# Altium PCB BEE-1012 PAY-IF V1.0.0.PcbDoc (part 2 of 3)
Units mm, origin at the board's own origin, x right, y up, seen from the top; angles counter-clockwise.
Board outline 93 x 90 mm, 8 copper layers (Top Layer, GND_Plane_2, Signal_3, Power_Plane, GND_Plane_5, Signal_6, GND_Plane_7, Bottom Layer), stack 1.672 mm thick; 514 components, 368 nets, 2268 pads, 326 vias.
Unrouted connection lines stored in the file: 1343.
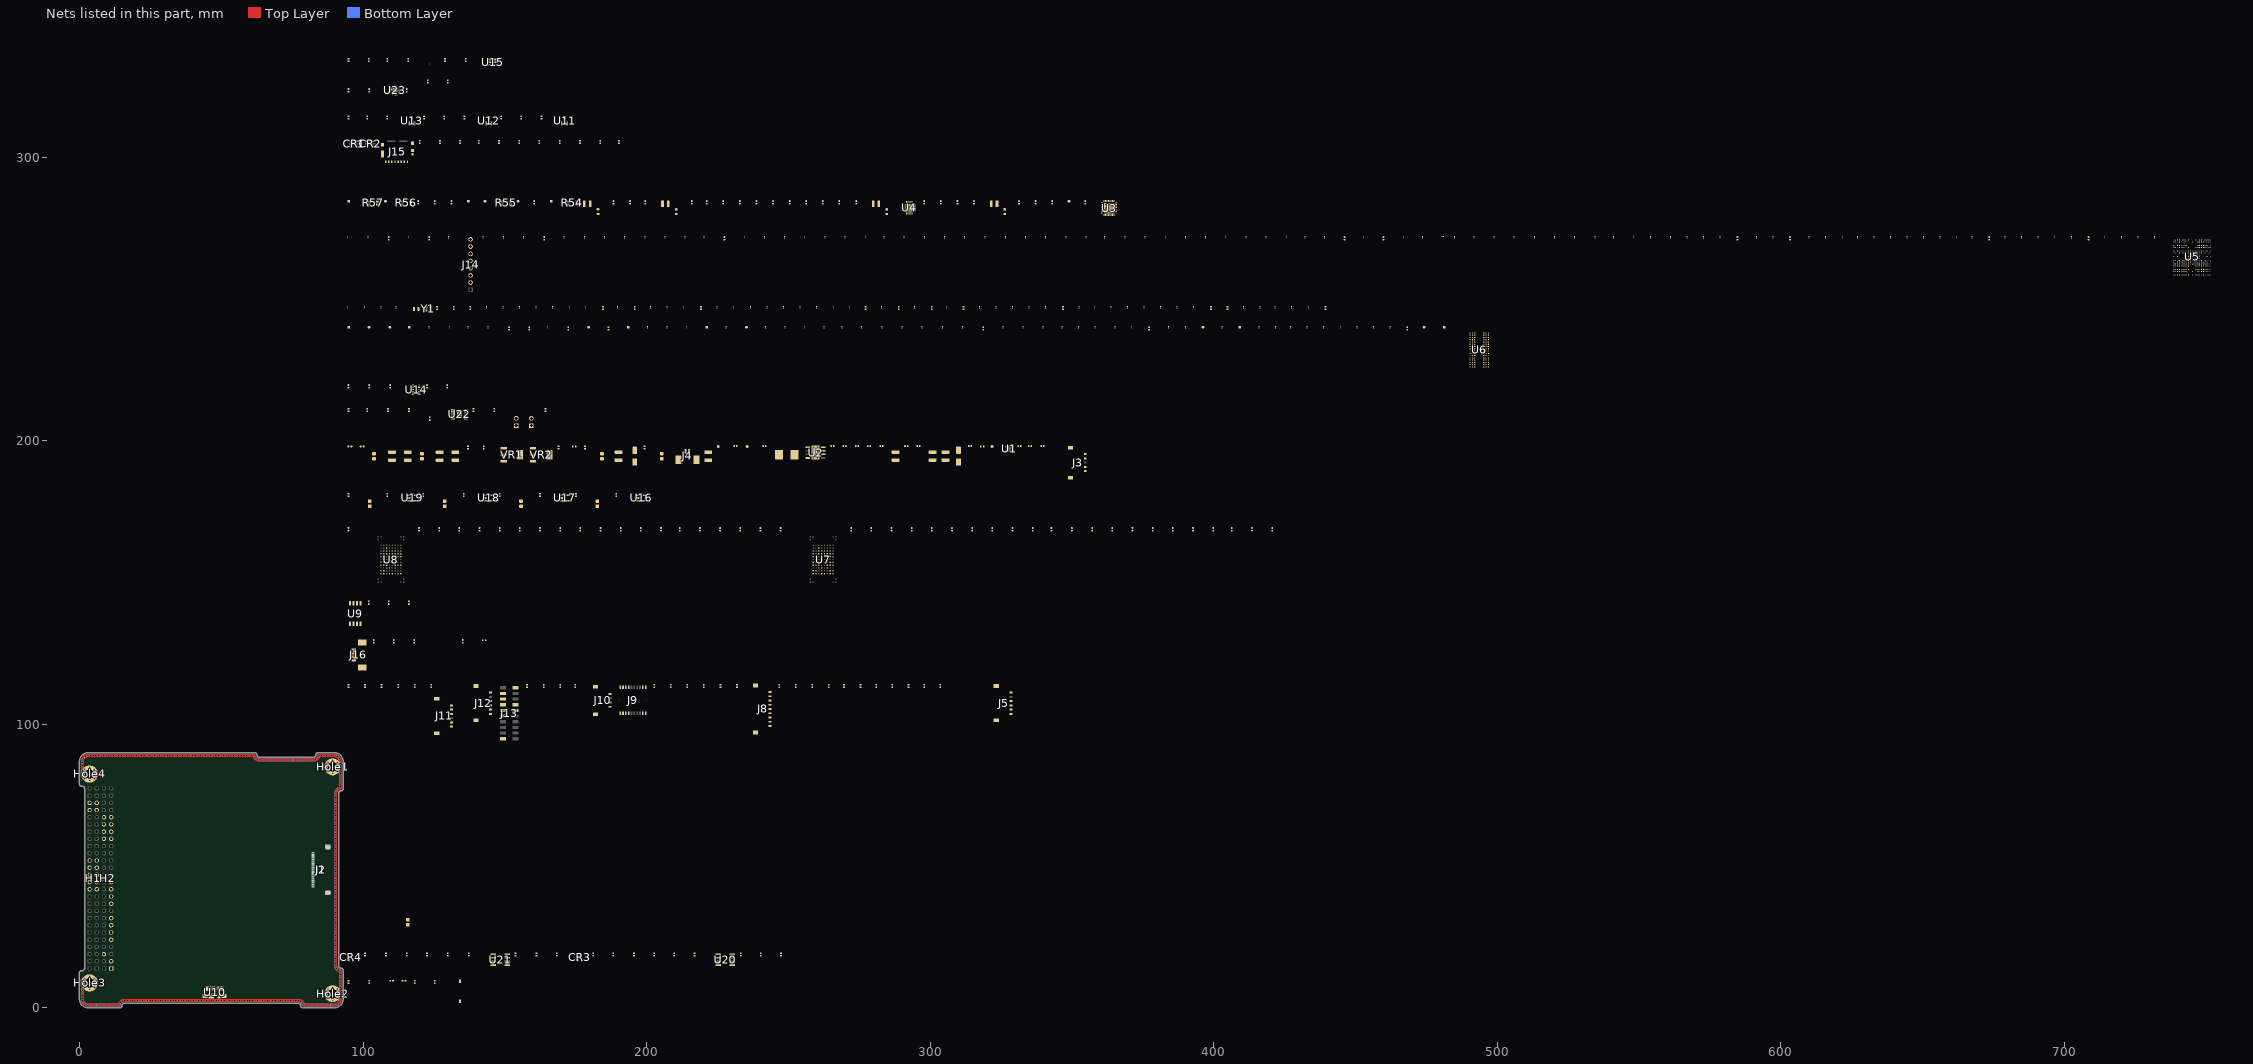
[diagram p6: the nets of this part, all layers, seen from the top]

## Footprints (in the part's own frame and the unit in brackets; to place one, negate y for a bottom-side part, rotate by r counter-clockwise, add the part's x,y. Pads: shape width x height; smd on the part's side, far side on the other; paste and mask are expansions set on the pad) (continued)
RES_C_0603X30 [mm] "Chip Resistor, 2-Leads, Body 0.6x0.3mm, IPC Medium Density"
  rrect50% 0.275x0.3 smd mask+0.05: 1(-0.262,0) 2(0.262,0)
  body extent -0.3,-0.15 0.3,0.15, height 0.22
RES_C_1005x30_L [mm] "Chip Resistor, 2-Leads, Body 1.0x0.5mm, IPC Medium Density"
  rrect50% 0.55x0.6 smd mask+0.05: 1(-0.45,0) 2(0.45,0)
  body extent -0.5,-0.3 0.5,0.3, height 0.2
RES_C_1005X40 [mm]
  rrect50% 0.65x0.6 smd mask+0.05: 1(-0.5,0) 2(0.5,0)
  silkscreen extent -0.04,-0.3 0.04,0.3, body extent -0.5,-0.25 0.5,0.25, height 0.38
RES_C_1206_SHUNT [mm] "Chip Resistor, 2-Leads, Body 3.2x1.6mm, IPC Medium Density"
  rect 1x0.5 smd mask+0.1: 1(-1.5,-0.6) 1(-1.5,0.6) 2(1.5,-0.6) 2(1.5,0.6)
  rect 1x0.35 smd mask+0.1: 3(-1.5,0) 4(1.5,0)
  silkscreen extent -0.6,-0.77 0.6,0.78, body extent -1.6,-0.8 1.6,0.8, height 1
SAMTEC-TLE-110-01-X-DV-A [mm]
  rect 1.12x2.11 smd mask+0: 1(-9,-2.222) 2(-9,2.222) 3(-7,-2.222) 4(-7,2.222) 5(-5,-2.222) 6(-5,2.222) 7(-3,-2.222) 8(-3,2.222) 9(-1,-2.222) 10(-1,2.222) 11(1,-2.222) 12(1,2.222) 13(3,-2.222) 14(3,2.222) 15(5,-2.222) 16(5,2.222) 17(7,-2.222) 18(7,2.222) 19(9,-2.222) 20(9,2.222)
  round 0.76 hole 0.76 unplated: ""(-8,0) ""(8,0)
  silkscreen extent -10.45,-4.45 10.45,3.73, body extent -9.99,-2.78 9.99,2.78, height 4.32
SAMTEC_ESQ-126-14-G-D [mm]
  rect 1.53x1.53 hole 0.9: 01(0,0)
  round 1.53 hole 0.9: 02(0,2.54) 03(2.54,0) 04(2.54,2.54) 05(5.08,0) 06(5.08,2.54) 07(7.62,0) 08(7.62,2.54) 09(10.16,0) 10(10.16,2.54) 11(12.7,0) 12(12.7,2.54) 13(15.24,0) 14(15.24,2.54) 15(17.78,0) 16(17.78,2.54) 17(20.32,0) 18(20.32,2.54) 19(22.86,0) 20(22.86,2.54) 21(25.4,0) 22(25.4,2.54) 23(27.94,0) 24(27.94,2.54) 25(30.48,0) 26(30.48,2.54) 27(33.02,0) 28(33.02,2.54) 29(35.56,0) 30(35.56,2.54) 31(38.1,0) 32(38.1,2.54) 33(40.64,0) 34(40.64,2.54) 35(43.18,0) 36(43.18,2.54) 37(45.72,0) 38(45.72,2.54) 39(48.26,0) 40(48.26,2.54) 41(50.8,0) 42(50.8,2.54) 43(53.34,0) 44(53.34,2.54) 45(55.88,0) 46(55.88,2.54) 47(58.42,0) 48(58.42,2.54) 49(60.96,0) 50(60.96,2.54) 51(63.5,0) 52(63.5,2.54)
  silkscreen extent -2.27,-1.2 65.03,3.74, body extent -1.52,-1.27 65.02,3.81, height 11.1
SAMTEC_FSI-110-03-X-D-AD-TR [mm]
  rect 0.61x1.26 smd: 01(-4.5,4.59) 02(-4.5,-4.59) 03(-3.5,4.59) 04(-3.5,-4.59) 05(-2.5,4.59) 06(-2.5,-4.59) 07(-1.5,4.59) 08(-1.5,-4.59) 09(-0.5,4.59) 10(-0.5,-4.59) 11(0.5,4.59) 12(0.5,-4.59) 13(1.5,4.59) 14(1.5,-4.59) 15(2.5,4.59) 16(2.5,-4.59) 17(3.5,4.59) 18(3.5,-4.59) 19(4.5,4.59) 20(4.5,-4.59)
  round 1.19 hole 1.19 unplated: ""(-4.5,0) ""(4.5,0)
  silkscreen extent -5.38,-4.38 5.38,5.9, body extent -5.38,-5 5.38,5, height 4.37
SOIC127P599X175-8N [mm]
  rrect25% 1.97x0.6 smd paste+0 mask+0.102: 1(-2.47,1.905) 2(-2.47,0.635) 3(-2.47,-0.635) 4(-2.47,-1.905) 5(2.47,-1.905) 6(2.47,-0.635) 7(2.47,0.635) 8(2.47,1.905)
  silkscreen extent -4.14,-2.52 1.95,2.52, body extent -3,-2.45 3,2.45, height 1.75
SOIC127P790X216-8N [mm]
  rect 1.65x0.7 smd: 1(-3.6,1.905) 2(-3.6,0.635) 3(-3.6,-0.635) 4(-3.6,-1.905) 5(3.6,-1.905) 6(3.6,-0.635) 7(3.6,0.635) 8(3.6,1.905)
  silkscreen extent -4.27,-2.62 2.42,2.62, body extent -3.95,-2.62 3.95,2.62, height 2.16
SOT323-3L_STM [mil]
  rect 18x40 smd paste+0 mask+0: 1(-25.59,-41) 2(25.59,-41) 3(0,41)
  silkscreen extent -48,-87 48,32, body extent -44,-47 44,47, height 43
SOT-23_MC_MCH [mil]
  rect 24x52 smd paste+0 mask+0: 1(-37.4,-39.97) 2(37.4,-39.97) 3(0,39.97)
  silkscreen extent -65,-94 65,33, body extent -60,-52 60,52, height 44
SRP7050TA-220M [mm]
  rect 2.95x3.5 smd: 1(-2.725,0) 2(2.725,0)
  silkscreen extent -4.4,-3.3 4.4,3.3, body extent -3.65,-3.3 3.65,3.3, height 4.6
SW2-SMD [mm]
  rect 1.2x0.8 smd: 1(-3.5,0) 2(3.5,0)
  silkscreen extent -2.82,-1.85 2.82,1.85, body extent -3.05,-1.85 3.05,1.85, height 2.5
"Test point" [mm]
  round 1 smd paste-2539.97 mask+0: 0(0,0)
  silkscreen extent -0.61,-0.61 0.61,0.61
TFBGA-343_14x14 [mm] "BGA, 343-Leads, Body 14,00mm x14,00mm, Pitch 0,65mm"
  round 0.3 smd mask+0.05: A1(-6.5,6.5) A2(-5.85,6.5) A3(-5.2,6.5) A4(-4.55,6.5) A5(-3.9,6.5) A6(-3.25,6.5) A7(-2.6,6.5) A8(-1.95,6.5) A9(-1.3,6.5) A11(0,6.5) A13(1.3,6.5) A14(1.95,6.5) A15(2.6,6.5) A16(3.25,6.5) A17(3.9,6.5) A18(4.55,6.5) A19(5.2,6.5) A20(5.85,6.5) A21(6.5,6.5) AA1(-6.5,-6.5) AA2(-5.85,-6.5) AA3(-5.2,-6.5) AA4(-4.55,-6.5) AA5(-3.9,-6.5) AA6(-3.25,-6.5) AA7(-2.6,-6.5) AA8(-1.95,-6.5) AA9(-1.3,-6.5) AA11(0,-6.5) AA13(1.3,-6.5) AA14(1.95,-6.5) AA15(2.6,-6.5) AA16(3.25,-6.5) AA17(3.9,-6.5) AA18(4.55,-6.5) AA19(5.2,-6.5) AA20(5.85,-6.5) AA21(6.5,-6.5) B1(-6.5,5.85) B2(-5.85,5.85) B3(-5.2,5.85) B4(-4.55,5.85) B6(-3.25,5.85) B7(-2.6,5.85) B9(-1.3,5.85) B13(1.3,5.85) B15(2.6,5.85) B16(3.25,5.85) B18(4.55,5.85) B19(5.2,5.85) B20(5.85,5.85) B21(6.5,5.85) C1(-6.5,5.2) C2(-5.85,5.2) C3(-5.2,5.2) C4(-4.55,5.2) C5(-3.9,5.2) C6(-3.25,5.2) C7(-2.6,5.2) C8(-1.95,5.2) C11(0,5.2) C14(1.95,5.2) C15(2.6,5.2) C16(3.25,5.2) C17(3.9,5.2) C18(4.55,5.2) C19(5.2,5.2) C20(5.85,5.2) C21(6.5,5.2) D1(-6.5,4.55) D2(-5.85,4.55) D3(-5.2,4.55) D4(-4.55,4.55) D5(-3.9,4.55) D6(-3.25,4.55) D7(-2.6,4.55) D8(-1.95,4.55) D9(-1.3,4.55) D13(1.3,4.55) D14(1.95,4.55) D15(2.6,4.55) D16(3.25,4.55) D17(3.9,4.55) D18(4.55,4.55) D19(5.2,4.55) D20(5.85,4.55) D21(6.5,4.55) E1(-6.5,3.9) E3(-5.2,3.9) E4(-4.55,3.9) E5(-3.9,3.9) E6(-3.25,3.9) E7(-2.6,3.9) E8(-1.95,3.9) E14(1.95,3.9) E15(2.6,3.9) E16(3.25,3.9) E17(3.9,3.9) E18(4.55,3.9) E19(5.2,3.9) E21(6.5,3.9) F1(-6.5,3.25) F2(-5.85,3.25) F3(-5.2,3.25) F4(-4.55,3.25) F5(-3.9,3.25) F6(-3.25,3.25) F7(-2.6,3.25) F8(-1.95,3.25) F9(-1.3,3.25) F13(1.3,3.25) F14(1.95,3.25) F15(2.6,3.25) F16(3.25,3.25) F17(3.9,3.25) F18(4.55,3.25) F19(5.2,3.25) F20(5.85,3.25) F21(6.5,3.25) G1(-6.5,2.6) G2(-5.85,2.6) G3(-5.2,2.6) G4(-4.55,2.6) G5(-3.9,2.6) G6(-3.25,2.6) G7(-2.6,2.6) G8(-1.95,2.6) G9(-1.3,2.6) G10(-0.65,2.6) G11(0,2.6) G12(0.65,2.6) G13(1.3,2.6) G14(1.95,2.6) G15(2.6,2.6) G16(3.25,2.6) G17(3.9,2.6) G18(4.55,2.6) G19(5.2,2.6) G20(5.85,2.6) G21(6.5,2.6) H1(-6.5,1.95) H3(-5.2,1.95) H4(-4.55,1.95) H5(-3.9,1.95) H6(-3.25,1.95) H7(-2.6,1.95) H8(-1.95,1.95) H9(-1.3,1.95) H10(-0.65,1.95) H11(0,1.95) H12(0.65,1.95) H13(1.3,1.95) H14(1.95,1.95) H15(2.6,1.95) H16(3.25,1.95) H17(3.9,1.95) H18(4.55,1.95) H19(5.2,1.95) H21(6.5,1.95) J1(-6.5,1.3) J2(-5.85,1.3) J4(-4.55,1.3) J6(-3.25,1.3) J7(-2.6,1.3) J8(-1.95,1.3) J9(-1.3,1.3) J10(-0.65,1.3) J11(0,1.3) J12(0.65,1.3) J13(1.3,1.3) J14(1.95,1.3) J15(2.6,1.3) J16(3.25,1.3) J18(4.55,1.3) J20(5.85,1.3) J21(6.5,1.3) K7(-2.6,0.65) K8(-1.95,0.65) K9(-1.3,0.65) K10(-0.65,0.65) K11(0,0.65) K12(0.65,0.65) K13(1.3,0.65) K14(1.95,0.65) K15(2.6,0.65) L1(-6.5,0) L3(-5.2,0) L7(-2.6,0) L8(-1.95,0) L9(-1.3,0) L11(0,0) L13(1.3,0) L14(1.95,0) L15(2.6,0) L19(5.2,0) L21(6.5,0) M7(-2.6,-0.65) M8(-1.95,-0.65) M9(-1.3,-0.65) M10(-0.65,-0.65) M11(0,-0.65) M12(0.65,-0.65) M13(1.3,-0.65) M14(1.95,-0.65) M15(2.6,-0.65) N1(-6.5,-1.3) N2(-5.85,-1.3) N4(-4.55,-1.3) N6(-3.25,-1.3) N7(-2.6,-1.3) N8(-1.95,-1.3) N9(-1.3,-1.3) N10(-0.65,-1.3) N11(0,-1.3) N12(0.65,-1.3) N13(1.3,-1.3) N14(1.95,-1.3) N15(2.6,-1.3) N16(3.25,-1.3) N18(4.55,-1.3) N20(5.85,-1.3) N21(6.5,-1.3) P1(-6.5,-1.95) P3(-5.2,-1.95) P4(-4.55,-1.95) P5(-3.9,-1.95) P6(-3.25,-1.95) P7(-2.6,-1.95) P8(-1.95,-1.95) P9(-1.3,-1.95) P10(-0.65,-1.95) P11(0,-1.95) P12(0.65,-1.95) P13(1.3,-1.95) P14(1.95,-1.95) P15(2.6,-1.95) P16(3.25,-1.95) P17(3.9,-1.95) P18(4.55,-1.95) P19(5.2,-1.95) P21(6.5,-1.95) R1(-6.5,-2.6) R2(-5.85,-2.6) R3(-5.2,-2.6) R4(-4.55,-2.6) R5(-3.9,-2.6) R6(-3.25,-2.6) R7(-2.6,-2.6) R8(-1.95,-2.6) R9(-1.3,-2.6) R10(-0.65,-2.6) R11(0,-2.6) R12(0.65,-2.6) R13(1.3,-2.6) R14(1.95,-2.6) R15(2.6,-2.6) R16(3.25,-2.6) R17(3.9,-2.6) R18(4.55,-2.6) R19(5.2,-2.6) R20(5.85,-2.6) R21(6.5,-2.6) T1(-6.5,-3.25) T2(-5.85,-3.25) T3(-5.2,-3.25) T4(-4.55,-3.25) T5(-3.9,-3.25) T6(-3.25,-3.25) T7(-2.6,-3.25) T8(-1.95,-3.25) T9(-1.3,-3.25) T13(1.3,-3.25) T14(1.95,-3.25) T15(2.6,-3.25) T16(3.25,-3.25) T17(3.9,-3.25) T18(4.55,-3.25) T19(5.2,-3.25) T20(5.85,-3.25) T21(6.5,-3.25) U1(-6.5,-3.9) U3(-5.2,-3.9) U4(-4.55,-3.9) U5(-3.9,-3.9) U6(-3.25,-3.9) U7(-2.6,-3.9) U8(-1.95,-3.9) U14(1.95,-3.9) U15(2.6,-3.9) U16(3.25,-3.9) U17(3.9,-3.9) U18(4.55,-3.9) U19(5.2,-3.9) U21(6.5,-3.9) V1(-6.5,-4.55) V2(-5.85,-4.55) V3(-5.2,-4.55) V4(-4.55,-4.55) V5(-3.9,-4.55) V6(-3.25,-4.55) V7(-2.6,-4.55) V8(-1.95,-4.55) V9(-1.3,-4.55) V13(1.3,-4.55) V14(1.95,-4.55) V15(2.6,-4.55) V16(3.25,-4.55) V17(3.9,-4.55) V18(4.55,-4.55) V19(5.2,-4.55) V20(5.85,-4.55) V21(6.5,-4.55) W1(-6.5,-5.2) W2(-5.85,-5.2) W3(-5.2,-5.2) W4(-4.55,-5.2) W5(-3.9,-5.2) W6(-3.25,-5.2) W7(-2.6,-5.2) W8(-1.95,-5.2) W11(0,-5.2) W14(1.95,-5.2) W15(2.6,-5.2) W16(3.25,-5.2) W17(3.9,-5.2) W18(4.55,-5.2) W19(5.2,-5.2) W20(5.85,-5.2) W21(6.5,-5.2) Y1(-6.5,-5.85) Y2(-5.85,-5.85) Y3(-5.2,-5.85) Y4(-4.55,-5.85) Y6(-3.25,-5.85) Y7(-2.6,-5.85) Y9(-1.3,-5.85) Y13(1.3,-5.85) Y15(2.6,-5.85) Y16(3.25,-5.85) Y18(4.55,-5.85) Y19(5.2,-5.85) Y20(5.85,-5.85) Y21(6.5,-5.85)
  silkscreen extent -7.15,-7.15 7.15,7.15, body extent -7,-7 7,7, height 1.22
TPL5010DDCR [mm]
  rrect25% 1.45x0.59 smd: 1(-1.155,0.95) 2(-1.155,0) 3(-1.155,-0.95) 4(1.155,-0.95) 5(1.155,0) 6(1.155,0.95)
  silkscreen extent -2.5,-1.57 0.8,1.57, body extent -1.4,-1.45 1.4,1.45, height 1.1
TWBGA96_ISI [mm]
  round 0.406 smd paste+0 mask+0: A1(-3.2,6) A2(-2.4,6) A3(-1.6,6) A7(1.6,6) A8(2.4,6) A9(3.2,6) B1(-3.2,5.2) B2(-2.4,5.2) B3(-1.6,5.2) B7(1.6,5.2) B8(2.4,5.2) B9(3.2,5.2) C1(-3.2,4.4) C2(-2.4,4.4) C3(-1.6,4.4) C7(1.6,4.4) C8(2.4,4.4) C9(3.2,4.4) D1(-3.2,3.6) D2(-2.4,3.6) D3(-1.6,3.6) D7(1.6,3.6) D8(2.4,3.6) D9(3.2,3.6) E1(-3.2,2.8) E2(-2.4,2.8) E3(-1.6,2.8) E7(1.6,2.8) E8(2.4,2.8) E9(3.2,2.8) F1(-3.2,2) F2(-2.4,2) F3(-1.6,2) F7(1.6,2) F8(2.4,2) F9(3.2,2) G1(-3.2,1.2) G2(-2.4,1.2) G3(-1.6,1.2) G7(1.6,1.2) G8(2.4,1.2) G9(3.2,1.2) H1(-3.2,0.4) H2(-2.4,0.4) H3(-1.6,0.4) H7(1.6,0.4) H8(2.4,0.4) H9(3.2,0.4) J1(-3.2,-0.4) J2(-2.4,-0.4) J3(-1.6,-0.4) J7(1.6,-0.4) J8(2.4,-0.4) J9(3.2,-0.4) K1(-3.2,-1.2) K2(-2.4,-1.2) K3(-1.6,-1.2) K7(1.6,-1.2) K8(2.4,-1.2) K9(3.2,-1.2) L1(-3.2,-2) L2(-2.4,-2) L3(-1.6,-2) L7(1.6,-2) L8(2.4,-2) L9(3.2,-2) M1(-3.2,-2.8) M2(-2.4,-2.8) M3(-1.6,-2.8) M7(1.6,-2.8) M8(2.4,-2.8) M9(3.2,-2.8) N1(-3.2,-3.6) N2(-2.4,-3.6) N3(-1.6,-3.6) N7(1.6,-3.6) N8(2.4,-3.6) N9(3.2,-3.6) P1(-3.2,-4.4) P2(-2.4,-4.4) P3(-1.6,-4.4) P7(1.6,-4.4) P8(2.4,-4.4) P9(3.2,-4.4) R1(-3.2,-5.2) R2(-2.4,-5.2) R3(-1.6,-5.2) R7(1.6,-5.2) R8(2.4,-5.2) R9(3.2,-5.2) T1(-3.2,-6) T2(-2.4,-6) T3(-1.6,-6) T7(1.6,-6) T8(2.4,-6) T9(3.2,-6)
  silkscreen extent -5.31,-7.3 5.31,7.3, body extent -5.05,-7.05 5.05,7.05, height 1.2
UQFN-16_4X4_EP2.6X2.6 [mm]
  rrect50% 0.8x0.35 smd paste+0 mask+0.075: 1(-2,0.975) 2(-2,0.325) 3(-2,-0.325) 4(-2,-0.975) 9(2,-0.975) 10(2,-0.325) 11(2,0.325) 12(2,0.975)
  rrect50% 0.35x0.8 smd paste+0 mask+0.057: 5(-0.975,-2) 6(-0.325,-2) 7(0.325,-2) 8(0.975,-2) 13(0.975,2) 14(0.325,2) 15(-0.325,2) 16(-0.975,2)
  rect 2.6x2.6 smd paste-0.25 mask+0.075: 17(0,0)
  silkscreen extent -2.15,-2.15 2.15,2.15, body extent -2,-2 2,2, height 0.5
VQFN-HR-10 [mm]
  rect 0.65x0.3 smd: 1(-0.938,0.692) 4(-0.941,-0.708) 7(0.909,-0.708) 10(0.909,0.692)
  rect 0.25x0.65 smd: 1(-0.738,0.867) 4(-0.741,-0.883) 7(0.709,-0.883) 10(0.709,0.867)
  rect 0.65x0.25 smd: 2(-0.938,0.216) 3(-0.941,-0.233) 8(0.909,-0.233) 9(0.909,0.216)
  rect 0.3x2.4 smd: 5(-0.265,-0.008) 6(0.235,-0.007)
  silkscreen extent -1.3,-1.25 1.28,1.23, body extent -1.03,-1.01 0.97,0.99, height 1
VREG_LM1117MP-3.3/NOPB [mm]
  rect 2.15x0.95 smd: 1(-2.9,2.3) 2(-2.9,0) 3(-2.9,-2.3)
  rect 2.15x3.25 smd: 4(2.9,0)
  silkscreen extent -4.7,-3.25 1.75,3.25, body extent -3.5,-3.25 3.5,3.25, height 1.8
XTAL_ECS2401037B2JTNTR [mm]
  rect 0.85x0.75 smd paste+0 mask+0.102: 1(-0.675,-0.525) 2(0.675,-0.525) 3(0.675,0.525) 4(-0.675,0.525)
  silkscreen extent -0.78,-1.57 -0.58,-1.37, body extent -1,-0.8 1,0.8, height 0.5

## Part data
BT1: library part BT2, "Switch button 2 pin"
C1 C2 C3 C4 C9 C10 C11 C12 C14 C15 C16 C17 C18 C19 C165 C167 C169 C171: library part _CAP_C_High_2, "CAP CHIP High Value"
C5 C6 C7 C8 C13 C20 C21 C22 C23 C24 C25 C26 C27 C28 C29 C30 C31 C32 C33 C34 C35 C36 C37 C38 C39 C40 C41 C42 C43 C44 C45 C46 C47 C48 C49 C50 C51 C52 C53 C54 C55 C56 C57 C58 C59 C60 C61 C62 C63 C64 C65 C66 C67 C68 C69 C70 C71 C72 C73 C74 C75 C76 C77 C78 C79 C80 C81 C82 C83 C84 C85 C86 C87 C88 C89 C90 C91 C92 C93 C94 C95 C96 C97 C98 C99 C100 C101 C102 C103 C104 C105 C106 C107 C108 C109 C110 C111 C112 C113 C114 C115 C116 C117 C118 C119 C120 C121 C122 C123 C124 C125 C126 C127 C128 C129 C130 C131 C132 C133 C134 C135 C136 C137 C138 C139 C140 C141 C142 C143 C144 C145 C146 C147 C148 C149 C150 C151 C152 C153 C154 C155 C156 C157 C158 C159 C160 C161 C162 C163 C164 C166 C168 C170 C172 C173 C174 C175 C176 C177 C178 C179 C180 C181 C182 C183: library part _CAP_C_2, "CAP CHIP"
CR1 CR2: "TVS DIODE 5.5VWM 6TSOP", Manufacturer_Name=Nexperia, Copyright="Copyright (C) 2025 Ultra Librarian. All rights reserved.", Manufacturer_Part_Number=IP4220CZ6,125, RefDes=RefDes, TYPE=Type
CR3 CR4: "TVS DIODE 26.5VWM 44VC SOT3233", Manufacturer_Name=STMicroelectronics, Copyright="Copyright (C) 2025 Ultra Librarian. All rights reserved.", Manufacturer_Part_Number=ESDCAN02-2BWY, RefDes=RefDes, TYPE=Type
D1: library part LED_RED, "LED RED CLEAR 0402 SMD"
D2 D3: "DIODE SCHOTTKY 40V 5A SMA", MPN=SS34, Solder=SMT
D4: library part LED_YELLOW, "LED YELLOW CLEAR 0402 SMD"
D5 D6 D9: library part LED_GREEN, "LED GREEN CLEAR 0402 SMD"
D7 D8: library part LED_BLUE
H1 H2: "CONN SOCKET 52POS 0.1 GOLD PCB", Package=None, Availability=Unavailable, MF=Samtec, MP=ESQ-126-14-G-D, Price=None
J1 J8: "Connector Header Surface Mount, Right Angle 9 position 0.059\" (1.50mm)"
J2: "Connector Header Surface Mount, Right Angle 8 position 0.059\" (1.50mm)`"
J3: "1.50mm Pitch, Pico-Lock PCB Header, Single Row, Right-Angle, Surface Mount, Gold (Au) Plating, Positive Lock, 5 Circuits, Tape and Reel", Manufacturer_Name="Molex Connector Corporation", Copyright="Copyright (C) 2025 Ultra Librarian. All rights reserved.", Manufacturer_Part_Number=5040500591, RefDes=RefDes, TYPE=Type
J4: library part "Header 2x1_2M"
J5 J11 J12: "1.50mm Pitch, Pico-Lock PCB Header, Single Row, Right-Angle, Surface Mount, Gold (Au) Plating, Positive Lock, 6 Circuits, Tape and Reel", Manufacturer_Name="Molex Connector Corporation", Copyright="Copyright (C) 2025 Ultra Librarian. All rights reserved.", Datasheet=https://www.molex.com/en-us/products/part-detail-pdf/5040500691?display=pdf, Manufacturer_Part_Number=5040500691, RefDes=RefDes, TYPE=Type
J9: library part FSI-110-03-X-D-AD-TR, "CONN STACKING 20POS SMD GOLD", Package=None, Availability=Unavailable, MP=FSI-110-03-X-D-AD-TR, Price=None
J10 J16: library part "Header 4x1_2M"
J13: library part SAMTEC-TLE-110-01-X-DV-A, "CONN RCPT 20POS 0.079 GOLD SMD", Package=None, Availability=Unavailable, MP=SAMTEC-TLE-110-01-X-DV-A, Price=None
J15: "9 (8 + 1) Position Card Connector Secure Digital - microSDâ„¢ Surface Mount, Right Angle Gold", Package=None, Check_prices=https://www.snapeda.com/parts/1051620001/Molex/view-part/?ref=eda, MF=Molex, MP=1051620001, SnapEDA_Link=https://www.snapeda.com/parts/1051620001/Molex/view-part/?ref=snap
L1: library part _IND, "FIXED IND 22UH 2.5A 170 MOHM SMD"
L2 L3 L4 L5: library part DFE252012P-1R5M=P2, "Fixed Inductor 1.5uH 3.5A R060 SMD", Package=None, Availability=Unavailable, MP=DFE252012P-1R5M=P2, Price=None
R1 R2 R3 R4 R5 R6 R7 R8 R9 R10 R11 R12 R13 R14 R15 R16 R17 R18 R19 R20 R21 R22 R23 R24 R25 R26 R27 R28 R29 R30 R31 R32 R33 R34 R35 R36 R37 R38 R39 R40 R41 R42 R43 R44 R45 R46 R47 R48 R49 R50 R51 R52 R53 R58 R59 R60 R61 R62 R63 R64 R65 R66 R67 R68 R69 R70 R71 R72 R73 R74 R75 R76 R77 R78 R79 R80 R81 R82 R83 R84 R85 R86 R87 R88 R89 R90 R91 R92 R93 R94 R95 R96 R97 R98 R99 R100 R101 R102 R103 R104 R105 R106 R107 R108 R109 R110 R112 R113 R114 R115 R116 R117 R118 R119 R120 R121 R122 R123 R124 R125 R126 R127 R128 R129 R130 R131 R132 R133 R134 R135 R136 R137 R138 R139 R140 R141 R142 R143 R144 R145 R146 R147 R148 R149 R150 R151 R152 R153 R154 R155 R156 R157 R158 R159 R160 R161 R162 R163 R164 R165 R166 R167 R168 R169 R170 R171 R172 R173 R174 R175 R176 R177 R178 R179 R180 R181 R182 R183 R184 R185 R186 R187 R188 R189 R190 R191 R192 R193 R194 R195 R196 R197 R198 R199 R200 R201 R202 R203 R204 R205 R206 R207 R208 R209 R210 R211 R212 R213 R214 R215 R216 R217 R218 R219 R220 R221 R222 R223 R224 R225 R226 R227 R228 R229 R230 R231 R232 R233 R234 R235 R236 R237 R238 R239 R?: library part _RES_B_2, "RES"
R54 R55 R56 R57: library part SHUNT, "Shunt Resistor, RES 0.047 OHM 1% 3/4W 1206", Current=4A, Manufacturer 1=SUSUMU, Manufacturer Part Number 1=KRL1632E-M-R047-F-T5, Operating Temperature="-55C to 155C", Package=1206, Power=3/4W, Supplier Part Number 1=408-1578-2-ND, Temperature Coefficient=±50ppm/C, Tolerance=1%, Category=Resistor, ComponentLink1Description="SVN Datasheet", ComponentLink1URL=https://chn-vm-apps.microchip.com/mchprepo/parts/Datasheets/n_catalog_partition09_en.pdf, ComponentLink2Description="Local Datasheet", ComponentLink2URL=C:\ALTIUM_WORK\00001_MCHP-CDB\Datasheets\n_catalog_partition09_en.pdf, ComponentLink3Description="Open Symbol", ComponentLink3URL="C:\ALTIUM_WORK\00001_MCHP-CDB\Library\LibraryRefs\Shunt 4 Pin.SchLib", ComponentLink4Description="Open Footprint", ComponentLink4URL=C:\ALTIUM_WORK\00001_MCHP-CDB\Library\Footprints\RES_C_1206_SHUNT.PcbLib, ComponentLink5Description="Open Footprint 2", ComponentLink6Description="Open Footprint 3", ComponentLink7Description="Open Footprint 4", Composition=MF, Description_="RES SHUNT MF 0.047R 1% 3/4W SMD 1206", Dev Tools Status=Design, MCHP-ID=RSMT1405, Owner="Ciprian Abramov", Populated=YES, Quantity Override=1, Restricted Sourcing=No, Revision=1, Status="MCL Design", Supplier 1=Digi-Key, Symbol="Shunt 4 Pin", TYPE=Shunt
TP1 TP2 TP3 TP4 TP5 TP6 TP7 TP8 TP9 TP10 TP11 TP12 TP13 TP14 TP15 TP16 TP17 TP18 TP19 TP20 TP21 TP22: library part "Test Point", "Test Point", Solder=NF
U2: "5.5V to 36V Input, 3A, 500kHz Step-Down Converter", Package="HSOIC-8 Texas Instruments", Availability="In Stock", Check_prices=https://www.snapeda.com/parts/TPS5430DDAR/Texas+Instruments/view-part/?ref=eda, MF="Texas Instruments", MP=TPS5430DDAR, Price=None, Purchase-URL=https://pricing.snapeda.com/search/part/TPS5430DDAR/?ref=eda, SnapEDA_Link=https://www.snapeda.com/parts/TPS5430DDAR/Texas+Instruments/view-part/?ref=snap
U3: library part MIC8878, Manufacturer 1="Microchip Technology", Manufacturer Part Number 1=MCP16502TAB-E/S8B, Supplier Part Number 1=150-MCP16502TAB-E/S8BCT-ND, Category=MCHP-Analog, ComponentLink1Description="SVN Datasheet", ComponentLink2Description="Local Datasheet", ComponentLink2URL=C:\ALTIUM_WORK\00001_MCHP-CDB\Datasheets\MCP16502-High-Performance-PMIC-for-SAMA5DX-SAM9X6-MPUs-Data-Sheet-DS20006275B.pdf, ComponentLink3Description="Open Symbol", ComponentLink3URL="C:\ALTIUM_WORK\00001_MCHP-CDB\Library\LibraryRefs\MCP16502 QFN-32.SchLib", ComponentLink4Description="Open Footprint", ComponentLink4URL=C:\ALTIUM_WORK\00001_MCHP-CDB\Library\Footprints\QFN-32_5X5_EP3.7X3.7.PcbLib, ComponentLink5Description="Open Footprint 2", ComponentLink6Description="Open Footprint 3", ComponentLink7Description="Open Footprint 4", Description_="MCHP ANALOG PMIC SWITCHER Buck ADJ MCP16502TAB-E/S8B QFN-32 for SAMA7G5 MPU with LPDDR/DDR2/DDR3", Dev Tools Status=Design, MCHP-ID=MIC8878, Owner="Dragos Danaila", Populated=YES, Quantity Override=1, Revision=1, Status="MCL Design", Supplier 1=Digi-Key, Symbol="MCP16502 QFN-32", TYPE=Switcher
U4: library part PAC1934T-I/JQ, "IC CURRENT MONITOR 1% 16UQFN", Manufacturer 1="Microchip Technology", Operating Temperature="-40C to +85C", Category=MCHP-Analog, ComponentLink1Description="SVN Datasheet", ComponentLink1URL=https://www.microchip.com/sitesearch/search/Product%20and%20Development%20Tools/PAC1934T-I/JQ, ComponentLink2Description="Local Datasheet", ComponentLink3Description="Open Symbol", ComponentLink3URL="C:\ALTIUM_WORK\00001_MCHP-CDB\Library\LibraryRefs\PAC1934 UQFN-16.SchLib", ComponentLink4Description="Open Footprint", ComponentLink4URL=C:\ALTIUM_WORK\00001_MCHP-CDB\Library\Footprints\UQFN-16_4X4_EP2.6X2.6.PcbLib, ComponentLink5Description="Open Footprint 2", ComponentLink6Description="Open Footprint 3", ComponentLink7Description="Open Footprint 4", Description_="MCHP ANALOG POWER CURRENT SENSE MONITOR PAC1934T-I/JQ UQFN-16", Dev Tools Status=Production, Manufacturer Part Number 1=PAC1934T-I/JQ, MCHP-ID=MIC7010, Owner="Razvan Cristescu", Populated=YES, Quantity Override=1, Restricted Sourcing=No, Revision=2, Status="MCL Design", Supplier 1="Microchip Technology", Supplier Part Number 1=PAC1934T-I/JQ, Symbol="PAC1934 UQFN-16", TYPE="Power/Current Sensor"
U5: "SAMA7D65 MPU 1000MHz Cortex-A7 TFBGA-343", Manufacturer 1="Microchip Technology", Manufacturer Part Number 1=SAMA7D65-V/4HB-SL3, Operating Temperature="-40C to +105C", Category=MCHP-Microcontroller, ComponentLink1Description="SVN Datasheet", ComponentLink1URL=https://www.microchip.com/sitesearch/search/Product%20and%20Development%20Tools/SAMA7D65-V/4HB-SL3, ComponentLink2Description="Local Datasheet", ComponentLink3Description="Open Symbol", ComponentLink3URL=C:\ALTIUM_WORK\00001_MCHP-CDB\Library\LibraryRefs\SAMA7D65-TFBGA-343.SchLib, ComponentLink4Description="Open Footprint", ComponentLink4URL=C:\ALTIUM_WORK\00001_MCHP-CDB\Library\Footprints\TFBGA-343_14x14.PcbLib, ComponentLink5Description="Open Footprint 2", ComponentLink6Description="Open Footprint 3", ComponentLink7Description="Open Footprint 4", Description_="MCHP MPU 32-BIT Cortex-A7 1000MHz 128kB SAMA7D65-V/4HB-SL3 TFBGA-343", Dev Tools Status=Design, MCHP-ID=IC2674, Owner="Ciprian Abramov", Populated=YES, Quantity Override=1, Restricted Sourcing=No, Revision=1, Status="MCL Design", Supplier 1="Microchip Technology", Supplier Part Number 1=SAMA7D65-V/4HB-SL3, Symbol=SAMA7D65-TFBGA-343, TYPE="32-Bit MPU"
U6: library part IC_RAM_IS43TR16512BL-125KBLI, "DDR3L", Manufacturer_Name=ISSI, Copyright="Copyright (C) 2025 Ultra Librarian. All rights reserved.", Manufacturer_Part_Number=IS43TR16512BL-125KBLI, RefDes=RefDes, TYPE=Type
U9: "MRAM Avalanche High Performance Serial P-SRAM 4Mb in SOIC8 package with QSPI - 108MHz interface, 3V, -40 C to 105 C", Manufacturer_Name="Avalanche Technology", Mouser Part Number=793-30042040108X0PSY, Datasheet Link=https://www.mouser.ph/ProductDetail/Avalanche-Technology/AS3004204-0108X0PSAY?qs=eP2BKZSCXI7G0ggegRejGg%3D%3D, Geometry.Height=2.16mm, Manufacturer_Part_Number=AS3004204-0108X0PSAY, Mouser Price/Stock=https://www.mouser.co.uk/ProductDetail/Avalanche-Technology/AS3004204-0108X0PSAY/?qs=eP2BKZSCXI7G0ggegRejGg%3D%3D
U10: "Micro-USB B Receptacle with Flange, Bottom Mount, Surface Mount, Lead-Free", Manufacturer_Name="Molex Connector Corporation", Copyright="Copyright (C) 2025 Ultra Librarian. All rights reserved.", Manufacturer_Part_Number=473460001, RefDes=RefDes, TYPE=Type
U11 U12 U13: "SENSOR ANALOG -40C-125C SOT23-3", Manufacturer_Name=Microchip, Copyright="Copyright (C) 2025 Ultra Librarian. All rights reserved.", Manufacturer_Part_Number=TC1047AVNBTR, RefDes=RefDes, TYPE=Type
U14: "Real-Time Clock Module with I2C-Bus", Package=None, Availability=Unavailable, MP=RV-3129-C3-32.768KHZ-OPTION-A-TB-QA, Price=None
U15: "OSC PROG TIMER TSOT23-6"
U16 U17: "Automotive LVDS Differential Driver"
U18 U19: "Automotive LVDS Differential Line Receiver"
U20 U21: "3.3 V CAN Transceiver with Standby Mode", Package="SOIC-8 Texas Instruments", Check_prices=https://www.snapeda.com/parts/SN65HVD230DR/Texas+Instruments/view-part/?ref=eda, MF="Texas Instruments", MP=SN65HVD230DR, SnapEDA_Link=https://www.snapeda.com/parts/SN65HVD230DR/Texas+Instruments/view-part/?ref=snap
U22: library part LTC2865HMSETRPBF, "Â±60V Fault Protected 3V to 5.5V RS485/RS422 Transceivers", Manufacturer_Name="Analog Devices Inc", Copyright="Copyright (C) 2025 Ultra Librarian. All rights reserved.", Manufacturer_Part_Number=LTC2865HMSE#TRPBF, RefDes=RefDes, TYPE=Type
U23: library part IC_USB_SW_FSUSB74MPX, "USB Switch IC 1 Channel 16-MLP (3x3)", Package="WQFN-16 ON Semiconductor", Check_prices=https://www.snapeda.com/parts/FSUSB74MPX/Onsemi/view-part/?ref=eda, MF="ON Semiconductor", MP=FSUSB74MPX, SnapEDA_Link=https://www.snapeda.com/parts/FSUSB74MPX/Onsemi/view-part/?ref=snap
VR1 VR2: "800-mA 15-V linear voltage regulator", Package="SOT-223-4 Texas Instruments", Check_prices=https://www.snapeda.com/parts/LM1117MP-3.3/NOPB/Texas+Instruments/view-part/?ref=eda, MF="Texas Instruments", MP=LM1117MP-3.3/NOPB, SnapEDA_Link=https://www.snapeda.com/parts/LM1117MP-3.3/NOPB/Texas+Instruments/view-part/?ref=snap
Y1: library part ECS-240-10-37B2-JTN-TR, "CRYSTAL 24 MHZ 10PF SMD", Load Capacitance=10pF, Manufacturer 1="ECS Inc", Operating Temperature="-40C to +85C", Package=L2.0W1.6H0.5, Supplier Part Number 1=50-ECS-240-10-37B2-JTN-TR-ND, Tolerance=20ppm, Category=Crystal/Oscillator, ComponentLink1Description="SVN Datasheet", ComponentLink1URL=https://chn-vm-apps.microchip.com/mchprepo/parts/Datasheets/ECX-1637B2.pdf, ComponentLink2Description="Local Datasheet", ComponentLink2URL=C:\ALTIUM_WORK\00001_MCHP-CDB\Datasheets\ECX-1637B2.pdf, ComponentLink3Description="Open Symbol", ComponentLink3URL="C:\ALTIUM_WORK\00001_MCHP-CDB\Library\LibraryRefs\Crystal 4 Pins.SchLib", ComponentLink4Description="Open Footprint", ComponentLink4URL=C:\ALTIUM_WORK\00001_MCHP-CDB\Library\Footprints\CRYSTAL_L2.0W1.6H0.5_FA-128.PcbLib, ComponentLink5Description="Open Footprint 2", ComponentLink6Description="Open Footprint 3", ComponentLink7Description="Open Footprint 4", Description_="CRYSTAL 24MHz 10pF SMD L2W1.6H0.5", Dev Tools Status=Design, Manufacturer Part Number 1=ECS-240-10-37B2-JTN-TR, MCHP-ID=OSC1299, Owner="Ciprian Abramov", Populated=YES, Quantity Override=1, Revision=1, Status="MCL Design", Supplier 1=Digi-Key, Symbol="Crystal 4 Pins", TYPE=Crystal
Y2: library part "FC-12M 32.7680KA-A3", "CRYSTAL 32.7680KHZ 12.5PF SMD", Load Capacitance=12.5pF, Manufacturer 1=Epson, Operating Temperature="-40°C ~ 85°C", Package="2-SMD, No Lead", Supplier Part Number 1=SER3672CT-ND, Tolerance=20ppm, Category=Crystal/Oscillator, ComponentLink1Description="SVN Datasheet", ComponentLink1URL=https://chn-vm-apps.microchip.com/mchprepo/parts/Datasheets/FC-12D_en.pdf, ComponentLink2Description="Local Datasheet", ComponentLink2URL=C:\ALTIUM_WORK\00001_MCHP-CDB\Datasheets\FC-12D_en.pdf, ComponentLink3Description="Open Symbol", ComponentLink3URL="C:\ALTIUM_WORK\00001_MCHP-CDB\Library\LibraryRefs\Crystal 2 Pins.SchLib", ComponentLink4Description="Open Footprint", ComponentLink4URL=C:\ALTIUM_WORK\00001_MCHP-CDB\Library\Footprints\CRYSTAL_FC-12M_L2.05W1.2H0.6.PcbLib, ComponentLink5Description="Open Footprint 2", ComponentLink6Description="Open Footprint 3", ComponentLink7Description="Open Footprint 4", Description_="CRYSTAL 32.768KHZ 12.5PF SMD 2-SMD, No Lead, FC-12M 32.7680KA-A3", Dev Tools Status=Design, Manufacturer Part Number 1="FC-12M 32.7680KA-A3", MCHP-ID=OSC1269, Owner="Dragos Danaila", Populated=YES, Quantity Override=1, Revision=1, Status="MCL Design", Supplier 1=Digikey, Symbol="Crystal 2 Pins", TYPE=Crystal

## Via types
v1: diameter 0.4, hole 0.2, Top Layer to Bottom Layer, 316 vias
v2: diameter 0.4, hole 0.2, Top Layer to Bottom Layer, tented both sides, 9 vias
v3: diameter 0.4, hole 0.4, Top Layer to Bottom Layer, 1 vias

## Nets (pads, with @x,y where several pads share a name; then routed paths per layer and width w, separated by ;. In a path a pad name is that pad's centre, name@x,y a point inside that pad or via, vN(x,y) a via of type N, cw(c..) or ccw(c..) an arc to the next point about the centre after c; other vN are vias at no path point)
3.3_VBAT: C13.1 C163.2 J4.1 R68.1 U14.9
3V3: C25.2 C26.2 C27.2 C28.2 C60.2 C61.2 C62.2 C63.2 C66.2 C67.2 C68.2 C69.2 C70.2 C149.2 C150.2 C151.2 C152.2 C153.2 C154.2 C155.2 C156.2 C158.2 C160.2 C162.2 C164.2 C182.2 C183.2 CR1.5 CR2.5 J14.2 J15.P4 J16.1 R44.1 R45.1 R47.2 R48.2 R49.2 R50.2 R54.2 R58.1 R59.1 R77.1 R85.1 R109.1 R114.1 R115.1 R117.1 R149.1 R157.1 R162.1 R190.2 R191.2 R192.2 R193.2 R194.2 R195.2 R196.2 R197.1 R199.1 R200.1 R204.1 R205.1 R206.1 R237.2 TP5.0 U4.2 U4.15 U5.C17 U5.F13 U5.G7 U5.H19 U5.L3 U5.L19 U5.P19 U5.T13 U9.8 U11.1 U12.1 U13.1 U14.2 U15.1 U23.4
3V3_COM: C15.2 C16.2 C165.2 C166.2 C167.2 C168.2 C169.2 C170.2 C171.2 C172.2 C173.2 C174.2 C176.2 C177.2 C180.2 C181.2 J9.03 J9.04 J9.17 J9.18 J13.2 R12.2 R231.2 R232.2 U16.1 U17.1 U18.1 U19.1 U20.3 U21.3 U22.5 U22.12 VR1.2 VR1.4
3V3_eMMC: C18.2 C19.2 C64.2 C65.2 C125.2 C126.2 C127.2 C128.2 C129.2 C130.2 C131.2 C132.2 C133.2 C134.2 C137.2 C138.2 C139.2 C140.2 C141.2 C142.2 C143.2 C144.2 C145.2 C146.2 R13.2 R172.1 R173.1 R174.1 R175.1 R176.1 R177.1 R178.1 R179.1 R180.1 R181.1 R182.1 R183.1 R184.1 R185.1 R186.1 R187.1 R188.1 R189.1 U5.F9 U5.W17 U7.F2@258.755,161.115 U7.F3@259.755,161.115 U7.F4@260.755,161.115 U7.F5@261.755,161.115 U7.F6@262.755,161.115 U7.F7@263.755,161.115 U7.F8@264.755,161.115 U7.F9@265.755,161.115 U7.H3@259.755,159.115 U7.H8@264.755,159.115 U7.L2@258.755,156.115 U7.L4@260.755,156.115 U7.L7@263.755,156.115 U7.L9@265.755,156.115 U7.P3@259.755,153.115 U7.P8@264.755,153.115 U8.F2@106.355,161.115 U8.F3@107.355,161.115 U8.F4@108.355,161.115 U8.F5@109.355,161.115 U8.F6@110.355,161.115 U8.F7@111.355,161.115 U8.F8@112.355,161.115 U8.F9@113.355,161.115 U8.H3@107.355,159.115 U8.H8@112.355,159.115 U8.L2@106.355,156.115 U8.L4@108.355,156.115 U8.L7@111.355,156.115 U8.L9@113.355,156.115 U8.P3@107.355,153.115 U8.P8@112.355,153.115 VR2.2 VR2.4
5V: C11.2 C12.2 C14.2 C17.2 C20.2 C23.2 C29.2 C31.2 C33.2 C34.2 L1.2 R9.2 R10.1 R52.2 TP3.0 U3.4 U3.10 U3.15 U3.20 U3.26 U3.31 VR1.3 VR2.3
12V: C2.2 C3.2 C9.2 C10.2 D2.1 R1.2 R2.2 R3.2 SB1.2 TP2.0 U1.6 U2.7
12V_CONN: C1.2 C4.2 C5.2 J1.1 J1.2 J1.3 J3.1 J3.2 R4.1 SB1.1 TP1.0 U1.5
ADC_TEMP_1: C157.2 R130.2 R201.2
ADC_TEMP_2: C159.2 R132.2 R202.2
ADC_TEMP_3: C161.2 R134.2 R203.2
AUXOFF: R1.1 U1.3
BUS_3V3: H1.27 H1.28
BUS_5V: H1.25 H1.26
CAN_H: CR3.1 CR4.1 R216.1 R218.1 R222.1 R224.1 U20.7 U21.7
CAN_H_main: H2.03 J1.9 R31.1 R216.2
CAN_L: CR3.2 CR4.2 R217.1 R220.2 R223.1 R226.2 U20.6 U21.6
CAN_L_main: H2.01 J1.8 R32.2 R217.2
CLK_EXP_CONNECTOR: J12.4 R37.2
CLK_EXP_PC104: H2.21 R20.2
CS_EXP_CONNECTOR: J12.3 R36.2
CS_EXP_PC104: H2.19 R19.2
DCDC1: C21.1 L2.2 R54.1 U3.9
DCDC2: C24.1 L3.2 R55.1 U3.16
DCDC3: C30.1 L4.2 R56.1 U3.25
DCDC4: C32.1 L5.2 R57.1 U3.32
DDR_A0: U5.W6 U6.N3
DDR_A1: U5.P6 U6.P7
DDR_A2: U5.V5 U6.P3
DDR_A3: U5.V6 U6.N2
DDR_A4: U5.R6 U6.P8
DDR_A5: U5.W4 U6.P2
DDR_A6: U5.P7 U6.R8
DDR_A7: U5.W2 U6.R2
DDR_A8: U5.L8 U6.T8
DDR_A9: U5.V4 U6.R3
DDR_A10: U5.T3 U6.L7
DDR_A11: U5.M9 U6.R7
DDR_A12: U5.P5 U6.N7
DDR_A13: U5.V2 U6.T3
DDR_A14: U5.L9 U6.T7
DDR_A15: U5.R4 U6.M7
DDR_BA0: U5.V8 U6.M2
DDR_BA1: U5.P4 U6.N8
DDR_BA2: U5.R8 U6.M3
DDR_CAS: U5.T8 U6.K3
DDR_CK_N: TP14.0 U5.T4 U6.K7
DDR_CK_P: TP13.0 U5.U4 U6.J7
DDR_CKE: U5.V3 U6.K9
DDR_CS: U5.V7 U6.L2
DDR_D0: TP11.0 U5.N2 U6.E3
DDR_D1: U5.M7 U6.F7
DDR_D2: U5.R3 U6.F2
DDR_D3: U5.M8 U6.F8
DDR_D4: U5.T2 U6.H3
DDR_D5: U5.N8 U6.H8
DDR_D6: U5.T1 U6.G2
DDR_D7: U5.N7 U6.H7
DDR_D8: TP12.0 U5.Y7 U6.D7
DDR_D9: U5.AA4 U6.C3
DDR_D10: U5.Y9 U6.C8
DDR_D11: U5.Y3 U6.C2
DDR_D12: U5.AA7 U6.A7
DDR_D13: U5.AA3 U6.A2
DDR_D14: U5.W7 U6.B8
DDR_D15: U5.W3 U6.A3
DDR_DQM0: U5.N1 U6.E7
DDR_DQM1: U5.Y4 U6.D3
DDR_DQS0_N: TP15.0 U5.R2 U6.G3
DDR_DQS0_P: TP16.0 U5.R1 U6.F3
DDR_DQS1_N: TP17.0 U5.AA6 U6.B7
DDR_DQS1_P: TP18.0 U5.Y6 U6.C7
DDR_ODT: U5.W1 U6.K1
DDR_RAS: U5.U8 U6.J3
DDR_RESET: R167.1 U5.V1 U6.T2
DDR_VREF: C100.1 C120.1 C122.2 C123.1 C124.1 R169.1 R170.2 U5.Y1 U6.H1 U6.M8
DDR_WE: U5.N10 U6.L3
EXP_USB_N: J2.8 R33.1 U5.G1
EXP_USB_P: J2.7 R34.1 U5.G2
FLEXCOM1_I2C_SCL: J2.6 R30.2 R38.1 R85.2 R123.2
FLEXCOM1_I2C_SDA: J2.5 R28.2 R35.1 R77.2 R124.2
FLEXCOM2_SPI_CLK: R161.2 U19.5
FLEXCOM2_SPI_MISO: R163.2 U18.5
FLEXCOM3_UART_RX: R101.2 U22.1
FLEXCOM3_UART_TX: R103.2 U22.4
FLEXCOM4_I2C_SCL: J9.05 R95.2 R114.2
FLEXCOM4_I2C_SDA: J9.06 R96.2 R109.2
FLEXCOM5_I2C_SCL: R29.1 R117.2 R137.2
FLEXCOM5_I2C_SDA: R27.1 R115.2 R135.2
FLEXCOM6_UART_TX: J13.14 R25.1 R?.2
FLEXCOM7_UART_RX: J13.11 R126.2
FLEXCOM7_UART_TX: J13.12 R125.2
FLEXCOM8_SPI_CK: R73.2 U17.5
FLEXCOM8_SPI_MOSI: R112.2 U16.5
FLEXCOM9_UART_RX_DEBUG: J16.3 R122.2 R200.2
FLEXCOM9_UART_TX_DEBUG: J16.2 R120.2 R199.2
FLEXCOM10_I2C_SCL: R82.2 R157.2 R158.1 R159.1 R160.1
FLEXCOM10_I2C_SDA: R80.2 R149.2 R154.1 R155.1 R156.1
FLT#: R2.1 U1.4
GND: BT1.1 C1.1 C2.1 C3.1 C4.1 C5.1 C6.1 C7.1 C9.1 C10.1 C11.1 C12.1 C13.2 C14.1 C15.1 C16.1 C17.1 C18.1 C19.1 C20.1 C21.2 C22.1 C23.1 C24.2 C25.1 C26.1 C27.1 C28.1 C29.1 C30.2 C31.1 C32.2 C33.1 C34.1 C35.1 C36.1 C37.1 C38.1 C39.1 C40.1 C41.1 C42.1 C43.1 C44.1 C45.1 C46.1 C47.1 C48.2 C49.1 C50.1 C51.1 C52.1 C53.1 C54.1 C55.1 C56.1 C57.1 C58.1 C59.1 C60.1 C61.1 C62.1 C63.1 C64.1 C65.1 C66.1 C67.1 C68.1 C69.1 C70.1 C71.1 C72.1 C73.1 C74.1 C75.1 C76.1 C77.1 C78.1 C79.2 C80.2 C81.2 C82.2 C83.2 C84.2 C85.2 C86.2 C87.2 C88.2 C89.2 C90.2 C91.2 C92.2 C93.2 C94.2 C95.2 C96.2 C97.2 C98.2 C99.2 C100.2 C101.2 C102.2 C103.2 C104.1 C105.1 C106.1 C107.1 C108.1 C109.1 C110.1 C111.1 C112.1 C113.1 C114.1 C115.1 C116.1 C117.1 C118.1 C119.1 C121.1 C122.1 C123.2 C124.2 C125.1 C126.1 C127.1 C128.1 C129.1 C130.1 C131.1 C132.1 C133.1 C134.1 C135.1 C136.1 C137.1 C138.1 C139.1 C140.1 C141.1 C142.1 C143.1 C144.1 C145.1 C146.1 C147.1 C148.1 C149.1 C150.1 C151.1 C152.1 C153.1 C154.1 C155.1 C156.1 C157.1 C158.1 C159.1 C160.1 C161.1 C162.1 C163.1 C164.1 C165.1 C166.1 C167.1 C168.1 C169.1 C170.1 C171.1 C172.1 C173.1 C174.1 C175.1 C176.1 C177.1 C178.1 C179.1 C180.1 C181.1 C182.1 C183.1 CR1.2 CR2.2 CR3.3 CR4.3 D1.1 D2.2 D3.2 D4.1 D5.1 D6.1 H1.29 H1.30 H1.31 H1.32 H1.47 H1.48 Hole1.1 Hole2.1 Hole3.1 Hole4.1 J1.4 J1.5 J1.6 J1.M1 J1.M2 J2.M1 J2.M2 J3.4 J3.5 J3.6 J4.2 J4.M1 J4.M2 J5.1 J5.7 J8.5 J8.M1 J8.M2 J9.01 J9.02 J9.19 J9.20 J10.4 J10.M1 J10.M2 J11.3 J11.7 J12.1 J12.7 J13.10 J13.13 J13.16 J13.18 J14.3 J15.G1 J15.G2 J15.G3 J15.G4 J15.P6 J16.4 J16.M1 J16.M2 R6.2 R7.2 R8.2 R11.2 R51.2 R53.1 R60.2 R62.1 R63.1 R64.1 R65.1 R66.1 R67.2 R164.2 R168.2 R170.1 R171.1 R198.1 R210.2 R211.2 R221.2 R227.2 R229.1 R230.1 R233.2 R236.1 R238.1 R239.1 TP19.0 TP20.0 TP21.0 TP22.0 U1.8 U2.6 U2.9 U3.3 U3.12 U3.13 U3.28 U3.29 U3.33 U4.3 U4.17 U5.A1 U5.A11 U5.A14 U5.A17 U5.A21 U5.AA1 U5.AA8 U5.AA9 U5.AA11 U5.AA14 U5.AA17 U5.AA21 U5.B6 U5.C4 U5.C7 U5.D9 U5.D13 U5.E1 U5.E7 U5.E15 U5.E21 U5.F16 U5.G5 U5.G9 U5.G11 U5.G15 U5.G17 U5.H1 U5.H8 U5.H9 U5.H14 U5.H21 U5.J4 U5.J18 U5.K11 U5.L1 U5.L7 U5.L11 U5.L15 U5.L21 U5.N4 U5.N18 U5.P1 U5.P8 U5.P14 U5.P21 U5.R5 U5.R7 U5.R11 U5.R15 U5.R17 U5.T5 U5.T17 U5.U1 U5.U7 U5.U15 U5.U21 U5.V9 U5.V13 U5.W5 U6.A9 U6.B1 U6.B3 U6.B9 U6.D1 U6.D8 U6.E1 U6.E2 U6.E8 U6.F9 U6.G1 U6.G8 U6.G9 U6.J2 U6.J8 U6.M1 U6.M9 U6.P1 U6.P9 U6.T1 U6.T9 U7.G2@258.755,160.115 U7.G3@259.755,160.115 U7.G4@260.755,160.115 U7.G5@261.755,160.115 U7.G6@262.755,160.115 U7.G7@263.755,160.115 U7.G8@264.755,160.115 U7.G9@265.755,160.115 U7.H2@258.755,159.115 U7.H9@265.755,159.115 U7.J5@261.755,158.115 U7.L3@259.755,156.115 U7.L8@264.755,156.115 U7.M4@260.755,155.115 U7.M7@263.755,155.115 U7.P2@258.755,153.115 U7.P9@265.755,153.115 U8.G2@106.355,160.115 U8.G3@107.355,160.115 U8.G4@108.355,160.115 U8.G5@109.355,160.115 U8.G6@110.355,160.115 U8.G7@111.355,160.115 U8.G8@112.355,160.115 U8.G9@113.355,160.115 U8.H2@106.355,159.115 U8.H9@113.355,159.115 U8.J5@109.355,158.115 U8.L3@107.355,156.115 U8.L8@112.355,156.115 U8.M4@108.355,155.115 U8.M7@111.355,155.115 U8.P2@106.355,153.115 U8.P9@113.355,153.115 U9.4 U10.5 U10.6 U10.7 U10.8 U10.9 U10.10 U10.11 U11.3 U12.3 U13.3 U14.6 U15.2 U16.2 U17.2 U18.2 U19.2 U20.2 U21.2 U22.6 U22.13 U23.1 U23.17 VR1.1 VR2.1 Y1.2 Y1.4 | length 570.9
  Top Layer w1: v1@1,3.2 ccw(c3.2,3.2) 3.2,1 5.009,1 7.709,1 10.409,1 13.109,1 14.011,1 cw(c15.8,0.8) 15.8,2.6 18.669,2.6 21.369,2.6 24.069,2.6 27.669,2.6 30.369,2.6 31.269,2.6 33.969,2.6 36.669,2.6 39.369,2.6 41.169,2.6 43.869,2.6 48.369,2.6 50.169,2.6 51.969,2.6 54.669,2.6 55.569,2.6 57.369,2.6 60.069,2.6 62.769,2.6 63.669,2.6 66.369,2.6 67.5,2.6 ; v1@1,3.213 1,4.288 1,6.988 Hole3.1@1,8.788 ; Hole4.1@1,82.55 1,84.104 1,86.463 1,86.8 cw(c3.2,86.8) v1@3.195,89 ; v1@3.2,89 3.959,89 8.459,89 9.359,89 12.959,89 14.759,89 17.459,89 20.159,89 21.059,89 23.759,89 26.459,89 28.259,89 30.959,89 31.859,89 32.759,89 35.459,89 39.959,89 43.559,89 44.459,89 48.959,89 51.659,89 54.359,89 55.259,89 56.159,89 57.959,89 61.611,89 ccw(c63.4,89.2) v1@63.4,87.4 ; v1@63.405,87.4 65.346,87.4 68.946,87.4 72.546,87.4 73.446,87.4 77.946,87.4 79.746,87.4 81.546,87.4 v1@82.594,87.4 ; 67.504,2.6 68.169,2.6 72.669,2.6 75.369,2.6 76.269,2.6 v1@77.198,2.6 ; v1@77.2,2.6 cw(c77.2,0.8) 78.989,1 80.151,1 84.651,1 87.351,1 89.8,1 ccw(c89.8,3.2) 92,3.2 92,6.345 92,9.945 92,10.845 92,13.011 cw(c92.2,14.8) v1@90.4,14.795 ; v1@82.6,87.4 ccw(c82.6,89.2) 84.389,89 88.025,89 v1@89.8,89 ; v1@89.805,89 cw(c89.8,86.8) 92,86.806 92,85 92,83.512 92,81.712 92,79.012 92,77.496 ccw(c92.2,75.707) 90.4,75.707 ; v1@90.4,14.8 90.4,17.461 90.4,20.161 90.4,21.061 90.4,24.661 90.4,27.361 90.4,30.961 90.4,32.761 90.4,33.661 90.4,35.461 90.4,39.061 90.4,41.761 90.4,44.461 90.4,45.361 90.4,47.161 90.4,49.861 90.4,52.561 90.4,54.361 90.4,57.061 90.4,57.961 90.4,62.461 90.4,65.161 90.4,68.761 90.4,69.661 90.4,74.161 90.4,75.702
  Bottom Layer w1: v1@1,3.2 ccw(c3.2,3.2) 3.2,1 5.009,1 7.709,1 10.409,1 13.109,1 14.011,1 cw(c15.8,0.8) 15.8,2.6 18.669,2.6 21.369,2.6 24.069,2.6 27.669,2.6 30.369,2.6 31.269,2.6 33.969,2.6 36.669,2.6 39.369,2.6 41.169,2.6 43.869,2.6 48.369,2.6 50.169,2.6 51.969,2.6 54.669,2.6 55.569,2.6 57.369,2.6 60.069,2.6 62.769,2.6 63.669,2.6 66.369,2.6 67.5,2.6 ; v1@1,3.213 1,4.288 1,6.988 Hole3.1@1,8.788 ; Hole4.1@1,82.55 1,84.104 1,86.463 1,86.8 cw(c3.2,86.8) v1@3.195,89 ; v1@3.2,89 3.959,89 8.459,89 9.359,89 12.959,89 14.759,89 17.459,89 20.159,89 21.059,89 23.759,89 26.459,89 28.259,89 30.959,89 31.859,89 32.759,89 35.459,89 39.959,89 43.559,89 44.459,89 48.959,89 51.659,89 54.359,89 55.259,89 56.159,89 57.959,89 61.611,89 ccw(c63.4,89.2) v1@63.4,87.4 ; v1@63.405,87.4 65.346,87.4 68.946,87.4 72.546,87.4 73.446,87.4 77.946,87.4 79.746,87.4 81.546,87.4 v1@82.594,87.4 ; 67.504,2.6 68.169,2.6 72.669,2.6 75.369,2.6 76.269,2.6 v1@77.198,2.6 ; v1@77.2,2.6 cw(c77.2,0.8) 78.989,1 80.151,1 84.651,1 87.351,1 89.8,1 ccw(c89.8,3.2) 92,3.2 92,6.345 92,9.945 92,10.845 92,13.011 cw(c92.2,14.8) v1@90.4,14.795 ; v1@82.6,87.4 ccw(c82.6,89.2) 84.389,89 88.025,89 v1@89.8,89 ; v1@89.805,89 cw(c89.8,86.8) 92,86.806 92,85 92,83.512 92,81.712 92,79.012 92,77.496 ccw(c92.2,75.707) 90.4,75.707 ; v1@90.4,14.8 90.4,17.461 90.4,20.161 90.4,21.061 90.4,24.661 90.4,27.361 90.4,30.961 90.4,32.761 90.4,33.661 90.4,35.461 90.4,39.061 90.4,41.761 90.4,44.461 90.4,45.361 90.4,47.161 90.4,49.861 90.4,52.561 90.4,54.361 90.4,57.061 90.4,57.961 90.4,62.461 90.4,65.161 90.4,68.761 90.4,69.661 90.4,74.161 90.4,75.702
  other v1: 3.209,1.017 4.109,1.017 5.009,1.017 5.909,1.017 6.809,1.017 7.709,1.017 8.609,1.017 9.509,1.017 10.409,1.017 11.309,1.017 12.209,1.017 13.109,1.017 14.009,1.017 79.251,1.017 80.151,1.017 81.051,1.017 81.951,1.017 82.851,1.017 83.751,1.017 84.651,1.017 85.551,1.017 86.451,1.017 87.351,1.017 88.251,1.017 89.151,1.017 90.051,1.033 2.328,1.201 90.904,1.32 78.681,1.714 1.595,1.723 14.4,1.828 91.573,1.921 78.028,2.333 15.096,2.399 1.132,2.495 77.169,2.602 15.969,2.615 16.869,2.617 17.769,2.617 18.669,2.617 19.569,2.617 20.469,2.617 21.369,2.617 22.269,2.617 23.169,2.617 24.069,2.617 24.969,2.617 25.869,2.617 26.769,2.617 27.669,2.617 28.569,2.617 29.469,2.617 30.369,2.617 31.269,2.617 32.169,2.617 33.069,2.617 33.969,2.617 34.869,2.617 35.769,2.617 36.669,2.617 37.569,2.617 38.469,2.617 39.369,2.617 40.269,2.617 41.169,2.617 42.069,2.617 42.969,2.617 43.869,2.617 44.769,2.617 45.669,2.617 46.569,2.617 47.469,2.617 48.369,2.617 49.269,2.617 50.169,2.617 51.069,2.617 51.969,2.617 52.869,2.617 53.769,2.617 54.669,2.617 55.569,2.617 56.469,2.617 57.369,2.617 58.269,2.617 59.169,2.617 60.069,2.617 60.969,2.617 61.869,2.617 62.769,2.617 63.669,2.617 64.569,2.617 65.469,2.617 66.369,2.617 67.269,2.617 68.169,2.617 69.069,2.617 69.969,2.617 70.869,2.617 71.769,2.617 72.669,2.617 73.569,2.617 74.469,2.617 75.369,2.617 76.269,2.617 91.933,2.746 1.017,3.388 91.983,3.645 1.017,4.288 91.983,4.545 1.017,5.188 91.983,5.445 1.017,6.088 91.983,6.345 1.017,6.988 91.983,7.245 1.017,7.888 91.983,8.145 1.017,8.788 91.983,9.045 91.983,9.945 91.983,10.845 91.983,11.745 91.983,12.645 91.345,13.28 90.705,13.912 90.405,14.761 90.383,15.661 90.383,16.561 90.383,17.461 90.383,18.361 90.383,19.261 90.383,20.161 90.383,21.061 90.383,21.961 90.383,22.861 90.383,23.761 90.383,24.661 90.383,25.561 90.383,26.461 90.383,27.361 90.383,28.261 90.383,29.161 90.383,30.061 90.383,30.961 90.383,31.861 90.383,32.761 90.383,33.661 90.383,34.561 90.383,35.461 90.383,36.361 90.383,37.261 90.383,38.161 90.383,39.061 90.383,39.961 90.383,40.861 90.383,41.761 90.383,42.661 90.383,43.561 90.383,44.461 90.383,45.361 90.383,46.261 90.383,47.161 90.383,48.061 90.383,48.961 90.383,49.861 90.383,50.761 90.383,51.661 90.383,52.561 90.383,53.461 90.383,54.361 90.383,55.261 90.383,56.161 90.383,57.061 90.383,57.961 90.383,58.861 90.383,59.761 90.383,60.661 90.383,61.561 90.383,62.461 90.383,63.361 90.383,64.261 90.383,65.161 90.383,66.061 90.383,66.961 90.383,67.861 90.383,68.761 90.383,69.661 90.383,70.561 90.383,71.461 90.383,72.361 90.383,73.261 90.383,74.161 90.383,75.061 90.441,75.959 90.831,76.77 91.534,77.332 91.983,78.112 91.983,79.012 91.983,79.912 91.983,80.812 91.983,81.712 91.983,82.612 1.017,82.863 91.983,83.512 1.017,83.763 91.983,84.412 1.017,84.663 91.983,85.312 1.017,85.563 91.983,86.212 1.017,86.463 91.962,87.111 1.092,87.36 63.546,87.387 64.446,87.383 65.346,87.383 66.246,87.383 67.146,87.383 68.046,87.383 68.946,87.383 69.846,87.383 70.746,87.383 71.646,87.383 72.546,87.383 73.446,87.383 74.346,87.383 75.246,87.383 76.146,87.383 77.046,87.383 77.946,87.383 78.846,87.383 79.746,87.383 80.646,87.383 81.546,87.383 82.446,87.386 62.675,87.612 83.318,87.609 91.649,87.955 1.498,88.164 61.985,88.19 84.01,88.184 91.027,88.605 2.191,88.738 3.059,88.976 3.959,88.983 4.859,88.983 5.759,88.983 6.659,88.983 7.559,88.983 8.459,88.983 9.359,88.983 10.259,88.983 11.159,88.983 12.059,88.983 12.959,88.983 13.859,88.983 14.759,88.983 15.659,88.983 16.559,88.983 17.459,88.983 18.359,88.983 19.259,88.983 20.159,88.983 21.059,88.983 21.959,88.983 22.859,88.983 23.759,88.983 24.659,88.983 25.559,88.983 26.459,88.983 27.359,88.983 28.259,88.983 29.159,88.983 30.059,88.983 30.959,88.983 31.859,88.983 32.759,88.983 33.659,88.983 34.559,88.983 35.459,88.983 36.359,88.983 37.259,88.983 38.159,88.983 39.059,88.983 39.959,88.983 40.859,88.983 41.759,88.983 42.659,88.983 43.559,88.983 44.459,88.983 45.359,88.983 46.259,88.983 47.159,88.983 48.059,88.983 48.959,88.983 49.859,88.983 50.759,88.983 51.659,88.983 52.559,88.983 53.459,88.983 54.359,88.983 55.259,88.983 56.159,88.983 57.059,88.983 57.959,88.983 58.859,88.983 59.759,88.983 60.659,88.983 61.559,88.983 84.425,88.983 85.325,88.983 86.225,88.983 87.125,88.983 88.025,88.983 88.925,88.983 89.825,88.985
  other v2: 361.893,280.867 363.093,280.867 364.293,280.867 361.893,282.067 363.093,282.067 364.293,282.067 361.893,283.267 363.093,283.267 364.293,283.267
  other v3: 6.11,13.88
GOM_VBAT: H1.45 H1.46
HHSRTUNE: R60.1 U5.K7
HPM_MCP16502: R42.1 R107.2 R162.2 R164.1
IF_MCU_SHUTDOWN: J1.7 R5.2
JTAG_NTRST_PC22: J14.6 R141.2
JTAG_TCK_PC23: J14.5 R142.2
JTAG_TDI_PC25: J14.4 R144.2
JTAG_TDO_PC26: J14.7 R145.2
JTAG_TMS_PC24: J14.8 R143.2
LPM: R41.1 TP4.0 U5.A6
LVDS_RXC_N: J8.9 R215.2 U19.4
LVDS_RXC_P: J8.8 R215.1 U19.3
LVDS_RXD_N: J8.4 R214.2 U18.4
LVDS_RXD_P: J8.3 R214.1 U18.3
LVDS_TXC_N: J8.7 R213.2 U17.3
LVDS_TXC_P: J8.6 R213.1 U17.4
LVDS_TXD_N: J8.2 R212.2 U16.3
LVDS_TXD_P: J8.1 R212.1 U16.4
MIPI_REXT: R67.1 U5.V18
MISO_EXP_CONNECTOR: J12.6 R40.2
MISO_EXP_PC104: H2.25 R22.2
MOSI_EXP_CONNECTOR: J12.5 R39.2
MOSI_EXP_PC104: H2.23 R21.2
MRAM_QSPI_CLK: R93.2 U9.6
MRAM_QSPI_CS: R92.2 R197.2 U9.1
MRAM_QSPI_D0: R91.2 U9.5
MRAM_QSPI_D1: R89.2 U9.2
MRAM_QSPI_D2: R87.2 U9.3
MRAM_QSPI_D3: R84.2 U9.7
NetBT1_2: BT1.2 C179.2 R228.1
NetC6_2: C6.2 U1.10
NetC7_2: C7.2 U1.7
NetC8_1: C8.1 D3.1 L1.1 U2.8
NetC8_2: C8.2 U2.1
NetC22_2: C22.2 U3.24
NetC135_2: C135.2 C136.2 U7.E4@260.755,162.115
NetC147_2: C147.2 C148.2 U8.E4@108.355,162.115
NetC175_2: C175.2 R218.2 R219.1 R220.1
NetC178_2: C178.2 R224.2 R225.1 R226.1
NetCR1_3: CR1.3 J15.P5 R147.2 R194.1
NetCR1_4: CR1.4 J15.P7 R148.2 R190.1
NetCR1_6: CR1.6 J15.P8 R150.2 R191.1
NetCR2_1: CR2.1 J15.P3 R146.2 R195.1
NetCR2_4: CR2.4 J15.P1 R152.2 R192.1
NetCR2_6: CR2.6 J15.P2 R116.2 R193.1
NetD1_2: D1.2 R3.1
NetD4_2: D4.2 R9.1
NetD5_2: D5.2 R12.1
NetD6_2: D6.2 R13.1
NetD7_1: D7.1 R198.2
NetD8_1: D8.1 R229.2
NetD8_2: D8.2 R151.2
NetD9_1: D9.1 R230.2
NetD9_2: D9.2 R153.2
NetH2_06: H2.06 R14.1
NetH2_09: H2.09 R15.2
NetH2_11: H2.11 R16.2
NetH2_13: H2.13 R17.2
NetH2_15: H2.15 R18.2
NetH2_37: H2.37 R23.2
NetH2_38: H2.38 R24.1
NetH2_39: H2.39 R25.2
NetH2_40: H2.40 R26.1
NetH2_41: H2.41 R27.2
NetH2_42: H2.42 R28.1
NetH2_43: H2.43 R29.2
NetH2_44: H2.44 R30.1
NetJ9_07: J9.07 R31.2 R222.2
NetJ9_08: J9.08 R32.1 R223.2
NetJ13_19: J13.19 R26.2 R121.2
NetJ15_P9: J15.P9 R119.2 R196.1
NetL2_1: L2.1 U3.11
NetL3_1: L3.1 U3.14
NetL4_1: L4.1 U3.27
NetL5_1: L5.1 U3.30
NetR4_2: R4.2 R6.1 U1.2
NetR5_1: R5.1 R7.1 U1.1
NetR8_1: R8.1 R128.2 U1.9
NetR10_2: R10.2 R11.1 U2.4
NetR41_2: R41.2 U3.22
NetR42_2: R42.2 U3.23
NetR43_2: R43.2 U3.8
NetR48_1: R48.1 R118.2 U3.1
NetR49_1: R49.1 U4.16
NetR50_1: R50.1 R113.2 U4.1
NetR51_1: R51.1 U4.6
NetR52_1: R52.1 R53.2 U3.18
NetR61_1: R61.1 R62.2 U5.H10
NetR105_2: R105.2 R209.2
NetR127_2: R127.2 U20.1
NetR129_2: R129.2 U20.4
NetR131_2: R131.2 U21.1
NetR133_2: R133.2 U21.4
NetR136_2: R136.2 R204.2 U14.3
NetR138_2: R138.2 R237.1 U23.15
NetR139_2: R139.2 R238.2 U23.6
NetR140_2: R140.2 R239.2 U23.5
NetR151_1: R151.1 U5.B19
NetR153_1: R153.1 U5.F20
NetR154_2: R154.2 U3.5
NetR158_2: R158.2 U3.6
NetR165_2: R165.2 R205.2 U14.7
NetR166_2: R166.2 R208.2
NetR168_1: R168.1 U5.AA2
NetR171_2: R171.2 U6.L8
NetR201_1: R201.1 U11.2
NetR202_1: R202.1 U12.2
NetR203_1: R203.1 U13.2
NetR206_2: R206.2 U14.1
NetR207_1: R207.1 U15.6
NetR208_1: R208.1 U15.5
NetR209_1: R209.1 U15.4
NetR210_1: R210.1 SB2.1
NetR211_1: R211.1 SB2.2 U15.3
NetR219_2: R219.2 U20.5
NetR221_1: R221.1 U20.8
NetR225_2: R225.2 U21.5
NetR227_1: R227.1 U21.8
NetR231_1: R231.1 R233.1 U22.7
NRST: C48.1 R47.1 R58.2 R207.2 R228.2 U3.2 U5.D3
NRST_OUT: R59.2 U5.E4
PA0: R71.1 U5.U18
PA1: R72.1 U5.V17
PA2: R74.1 U5.R14
PA3: R75.1 U5.T18
PA4: R76.1 U5.P16
PA5: R78.1 U5.V16
PA6: R79.1 U5.T14
PA7: R81.1 U5.P15
PA8: R83.1 U5.R13
PA9: R86.1 U5.U14
PA10: R88.1 U5.R12
PA11: R90.1 U5.P12
PA14: R94.1 U5.V14
PA17: R95.1 U5.R9
PA18: R96.1 U5.W16
PA21: R97.1 U5.W19
PA22: R99.1 U5.P10
PA23: R101.1 U5.AA20
PA24: R103.1 U5.P9
PA25: R105.1 U5.B21
PA26: R107.1 U5.K14
PA28: R?.1 U5.L13
PA30: R112.1 U5.K15
PA31: R113.1 U5.F21
PAC1934_TWCK: R45.2 R159.2 U4.4
PAC1934_TWD: R44.2 R155.2 U4.5
PB1: R73.1 U5.G21
PB6: R80.1 U5.K13
PB7: R82.1 U5.C20
PB8: R84.1 U5.T19
PB9: R87.1 U5.R18
PB10: R89.1 U5.P17
PB11: R91.1 U5.R19
PB12: R92.1 U5.P18
PB13: R93.1 U5.N14
PB21: R98.1 U5.D15
PB22: R100.1 U5.C14
PB23: R102.1 U5.D14
PB24: R104.1 U5.B15
PB25: R106.1 U5.A13
PB26: R108.1 U5.A15
PB27: R110.1 U5.C11
PC2: R118.1 U5.D7
PC3: R120.1 U5.G8
PC4: R122.1 U5.C2
PC11: R128.1 U5.C1
PC12: R130.1 U5.H5
PC13: R132.1 U5.D1
PC14: R134.1 U5.J7
PC17: R136.1 U5.D4
PC22: R141.1 U5.F4
PC23: R142.1 U5.A3
PC24: R143.1 U5.F5
PC25: R144.1 U5.B3
PC26: R145.1 U5.G6
PC27: R146.1 U5.C15
PC28: R147.1 U5.D16
PC29: R148.1 U5.B16
PC30: R150.1 U5.D17
PC31: R152.1 U5.A16
PD0: R116.1 U5.C16
PD2: R119.1 U5.G13
PD3: R121.1 U5.B18
PD6: R123.1 U5.G10
PD7: R124.1 U5.A20
PD8: R125.1 U5.G14
PD9: R126.1 U5.F14
PD10: R127.1 U5.G16
PD11: R129.1 U5.H11
PD12: R131.1 U5.D18
PD13: R133.1 U5.J11
PD16: R135.1 U5.E18
PD17: R137.1 U5.H13
PD18: R138.1 U5.H16
PD19: R139.1 U5.F18
PD20: R140.1 U5.J12
PE4: R161.1 U5.AA13
PE9: R163.1 U5.Y16
PIOBU0: R165.1 U5.J10
PIOBU1: R166.1 U5.A5
QSPI0_CAL: R63.2 U5.M13
RS422_DE: R99.2 R236.2 U22.3
RS422_R\E\: R97.2 R232.1 U22.2
RS_422_RX_N: J5.5 JP2.1 R16.1 R23.1 R234.2 U22.10
RS_422_RX_P: J5.6 JP1.1 R15.1 R24.2 R234.1 U22.11
RS_422_TX_N: J5.4 JP2.2 R18.1 R235.1 U22.9
RS_422_TX_P: J5.3 JP1.2 R17.1 R235.2 U22.8
SAM_RTC_I2C_SCL: R160.2 U14.4
SAM_RTC_I2C_SDA: R156.2 U14.5
SCL_EXP_CONNECTOR: J11.5 J11.6 R38.2
SDA_EXP_CONNECTOR: J11.1 J11.2 R35.2
SDMMC0_CAL: R64.2 U5.R16
SDMMC0_CLK: R71.2 R180.2 U7.P6@262.755,153.115
SDMMC0_CMD: R72.2 R181.2 U7.P5@261.755,153.115
SDMMC0_D0: R75.2 R172.2 U7.K2@258.755,157.115
SDMMC0_D1: R76.2 R173.2 U7.N2@258.755,154.115
SDMMC0_D2: R86.2 R174.2 U7.K3@259.755,157.115
SDMMC0_D3: R88.2 R175.2 U7.N3@259.755,154.115
SDMMC0_D4: R78.2 R176.2 U7.N8@264.755,154.115
SDMMC0_D5: R79.2 R177.2 U7.K8@264.755,157.115
SDMMC0_D6: R81.2 R178.2 U7.N9@265.755,154.115
SDMMC0_D7: R83.2 R179.2 U7.K9@265.755,157.115
SDMMC0_DS: R90.2 U7.K5@261.755,157.115
SDMMC0_NRST: R74.2 R182.2 U7.M5@261.755,155.115
SDMMC1_CAL: R65.2 U5.B13
SDMMC1_CLK: R102.2 R187.2 U8.P6@110.355,153.115
SDMMC1_CMD: R100.2 R188.2 U8.P5@109.355,153.115
SDMMC1_D0: R104.2 R183.2 U8.K2@106.355,157.115
SDMMC1_D1: R106.2 R184.2 U8.N2@106.355,154.115
SDMMC1_D2: R108.2 R185.2 U8.K3@107.355,157.115